# Altium PCB gps-tag-lora-addon.PcbDoc (part 2 of 3)
Units mm, origin at the board's own origin, x right, y up, seen from the top; angles counter-clockwise.
Board outline 60 x 35 mm, 2 copper layers (Top Layer, Bottom Layer); 76 components, 64 nets, 296 pads, 200 vias.
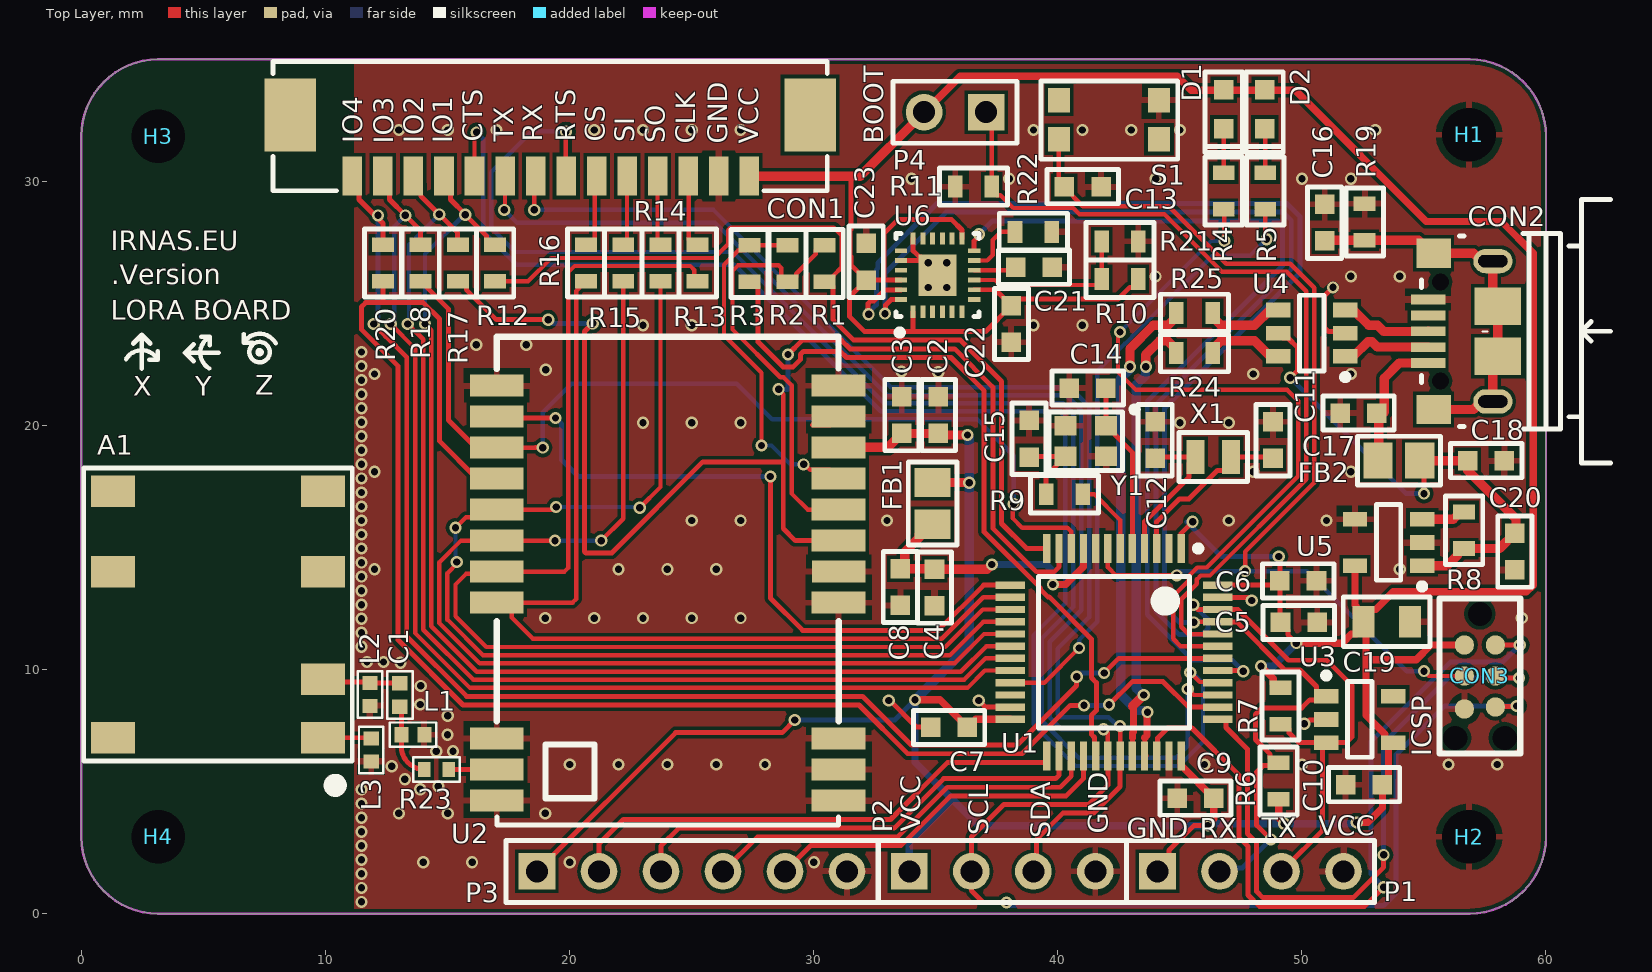
[diagram p0: Top Layer view]

## Part data (continued)
U3: "MICROCHIP   24AA02E48T-I/OT   EEPROM, EUI-48 Node Identity, 2 Kbit, 2 BLK (128K x 8bit), 400 kHz, I2C, SOT-23, 5 Pins", Case/Package=SOT-23, Frequency=400kHz, Manufacturer=Microchip, Max Frequency=100kHz, Max Operating Temperature=85°C, Max Supply Voltage=5.5V, Min Operating Temperature=-40°C, Min Supply Voltage=1.7V, Nominal Supply Current=3mA, Operating Supply Voltage=5V, Package Quantity=3000, Supplier Part Number 1=1688855, Access Time=3500ns, ComponentLink1Description=http://www.farnell.com/datasheets/1725195.pdf?src-supplier=Element14, ComponentLink1URL=http://www.farnell.com/datasheets/1725195.pdf?src-supplier=Element14, ComponentLink2Description=http://www.farnell.com/datasheets/631538.pdf?src-supplier=Element14, ComponentLink2URL=http://www.farnell.com/datasheets/631538.pdf?src-supplier=Element14, ComponentLink3Description=http://ww1.microchip.com/downloads/en/DeviceDoc/22124D.pdf?src-supplier=Avnet+Europe, ComponentLink3URL=http://ww1.microchip.com/downloads/en/DeviceDoc/22124D.pdf?src-supplier=Avnet+Europe, ComponentLink4Description=http://www.microchip.com/mymicrochip/filehandler.aspx?ddocname=en538826&src-supplier=Future+Electronics, ComponentLink4URL=http://www.microchip.com/mymicrochip/filehandler.aspx?ddocname=en538826&src-supplier=Future+Electronics, ComponentLink5Description=http://www.produktinfo.conrad.com/datenblaetter/650000-674999/651228-da-01-en-EEPROM_24AA02E48T_I_OT_SOT_23_5_MCP.pdf?src-supplier=Conrad, ComponentLink5URL=http://www.produktinfo.conrad.com/datenblaetter/650000-674999/651228-da-01-en-EEPROM_24AA02E48T_I_OT_SOT_23_5_MCP.pdf?src-supplier=Conrad, Density=2Kb, Height=1.3mm, Interface=I2C,Serial, Lead Free="Lead Free", Length=3.1mm, Manufacturer Part Number=24AA02E48T-I/OT, Memory Size=2Kb, Memory Type=EEPROM, Mount="Surface Mount", Number of Pins=5, Packaging="Tape and Reel", Pricing 1="1 = 0.17600, 10 = 0.17100, 25 = 0.16400, 50 = 0.16000, 100 = 0.15600 (GBP)", Radiation Hardening=No, REACH SVHC="No SVHC", RoHS=Yes, Stock 1=13638, Supplier 1=Farnell, Termination=SMD/SMT, Width=1.8mm
U4: "TVS DIODE 5.25VWM 17VC SOT23-6", Breakdown Voltage=6V, Capacitance=3.5pF, Case/Package=SOT-23, Clamping Voltage=17V, Leakage Current=150nA, Manufacturer=STMicroelectronics, Max Operating Temperature=125°C, Min Operating Temperature=-40°C, Operating Supply Voltage=1.1V, Package Quantity=3000, Peak Pulse Current=5A, Power Line Protection=Yes, Reverse Standoff Voltage=5.25V, Supplier Part Number 1=1269406, Test Current=1mA, Working Voltage=5V, ComponentLink1Description=http://www.farnell.com/datasheets/1690354.pdf, ComponentLink1URL=http://www.farnell.com/datasheets/1690354.pdf, ComponentLink2Description=http://www.st.com/content/ccc/resource/technical/document/datasheet/06/1d/48/9c/6c/20/4a/b2/CD00050750.pdf/files/CD00050750.pdf/jcr:content/translations/en.CD00050750.pdf, ComponentLink2URL=http://www.st.com/content/ccc/resource/technical/document/datasheet/06/1d/48/9c/6c/20/4a/b2/CD00050750.pdf/files/CD00050750.pdf/jcr:content/translations/en.CD00050750.pdf, ComponentLink3Description=http://www.st.com/web/en/resource/technical/document/datasheet/CD00050750.pdf, ComponentLink3URL=http://www.st.com/web/en/resource/technical/document/datasheet/CD00050750.pdf, ComponentLink4Description=http://datasheet.iiic.cc/stmicroelectronics/USBLC6-2SC6.pdf, ComponentLink4URL=http://datasheet.iiic.cc/stmicroelectronics/USBLC6-2SC6.pdf, ComponentLink5Description=http://www.produktinfo.conrad.com/datenblaetter/1100000-1199999/001184109-da-01-en-IC_ESD_PROTECTI_USBLC6_2SC6_SOT_23_6_STM.pdf, ComponentLink5URL=http://www.produktinfo.conrad.com/datenblaetter/1100000-1199999/001184109-da-01-en-IC_ESD_PROTECTI_USBLC6_2SC6_SOT_23_6_STM.pdf, Contact Plating=Matte,Tin, Data Rate=480Mbps, Depth=1.75mm, Direction=Bidirectional,Unidirectional, Element Configuration=Dual, ESD Protection=Yes, Height=1.3mm, Lead Free="Lead Free", Length=3.05mm, Manufacturer Part Number=USBLC6-2SC6, Max Breakdown Voltage=6V, Max Reverse Leakage Current=150nA, Min Breakdown Voltage=6V, Mount="Surface Mount", Number of Bidirectional Channels=2, Number of Channels=2, Number of Elements=1, Number of Pins=6, Packaging="Tape and Reel", Polarity=Bidirectional,Unidirectional, Pricing 1="5=0.327, 50=0.216, 100=0.165, 500=0.155, 1500=0.145 (GBP)", Radiation Hardening=No, REACH SVHC="No SVHC", Reverse Breakdown Voltage=6V, Stock 1=40838, Supplier 1=Farnell, Termination=SMD/SMT, Width=1.75mm
U5: "IC REG LINEAR 2.6V 150MA SOT23-5", Case/Package=TSOT, Dropout Voltage=130mV, Manufacturer="Texas Instruments", Max Input Voltage=5.5V, Max Operating Temperature=105°C, Max Output Current=150mA, Max Power Dissipation=500mW, Min Input Voltage=2.2V, Min Operating Temperature=-40°C, Nominal Output Voltage=2.6V, Output Voltage Accuracy=2%, Package Quantity=1, Quiescent Current=500nA, Supplier Part Number 1=296-35542-1-ND, Accuracy=2%, ComponentLink1Description=http://www.ti.com/lit/ds/symlink/tps783.pdf?src-supplier=Digi-Key, ComponentLink1URL=http://www.ti.com/lit/ds/symlink/tps783.pdf?src-supplier=Digi-Key, ComponentLink2Description=http://www.mouser.com/ds/2/405/sbvs133a-521627.pdf?src-supplier=Mouser, ComponentLink2URL=http://www.mouser.com/ds/2/405/sbvs133a-521627.pdf?src-supplier=Mouser, ComponentLink3Description=http://www.farnell.com/datasheets/1865508.pdf?src-supplier=Element14, ComponentLink3URL=http://www.farnell.com/datasheets/1865508.pdf?src-supplier=Element14, Height=1mm, Lead Free="Lead Free", Length=3.05mm, Manufacturer Part Number=TPS78326DDCT, Min Current Limit=150mA, Mount="Surface Mount", Number of Outputs=1, Number of Pins=5, Number of Regulators=1, Output Current=150mA, Output Type=Fixed, Output Voltage=2.6V, Packaging="Tape and Reel", Polarity=Positive, Power Dissipation=500mW, Power Rating=500mW, Pricing 1="1 = 0.96000, 10 = 0.85700, 100 = 0.66810 (USD)", Radiation Hardening=No, REACH SVHC="No SVHC", RoHS=Yes, Stock 1=873, Supplier 1=Digi-Key, Width=1.75mm
U6: "IMU ACCEL/GYRO/MAG I2C/SPI 24QFN", Case/Package=QFN, Manufacturer="TDK InvenSense", Max Operating Temperature=85°C, Max Supply Voltage=3.6V, Min Operating Temperature=-40°C, Min Supply Voltage=2.4V, Package Quantity=1, Supplier Part Number 1=883-7942P, ComponentLink1Description=https://datasheet.ciiva.com/29175/mpu-9250-29175105.pdf?src-supplier=Digi-Key, ComponentLink1URL=https://datasheet.ciiva.com/29175/mpu-9250-29175105.pdf?src-supplier=Digi-Key, Height=1mm, Interface=I2C, Length=3.1mm, Manufacturer Part Number=MPU-9250, Mount="Surface Mount", Number of Pins=24, Output Type=SPI, RoHS=Yes, Sensor Type=Accelerometer, Stock 1=0, Supplier 1=RSComponents, Width=3.1mm
X1: library part ABS06-107-32.768KHZ-T, "32.768KHz 4pF Max. ESR 81 Kohms", Case/Package=0805, Case Code (Metric)=2012, ESR (Equivalent Series Resistance)=60kR, Frequency=32.768kHz, Frequency Stability=175ppm, Frequency Tolerance=20ppm, Load Capacitance=4pF, Manufacturer=Abracon, Max Operating Temperature=85°C, Min Operating Temperature=-40°C, Package Quantity=3000, Series Resistance=80kR, Supplier Part Number 1=2467860, Case Code (Imperial)=0805, ComponentLink1Description=https://datasheet.ciiva.com/23910/1759010-23910051.pdf, ComponentLink1URL=https://datasheet.ciiva.com/23910/1759010-23910051.pdf, ComponentLink2Description=https://datasheet.ciiva.com/24028/abs06-107-32-768khz-t-24028377.pdf, ComponentLink2URL=https://datasheet.ciiva.com/24028/abs06-107-32-768khz-t-24028377.pdf, ComponentLink3Description=https://datasheet.ciiva.com/29630/abs06-107-32-768khz-t-29630938.pdf, ComponentLink3URL=https://datasheet.ciiva.com/29630/abs06-107-32-768khz-t-29630938.pdf, ComponentLink4Description=https://datasheet.ciiva.com/29630/abs06-107-32-768khz-t-29630939.pdf, ComponentLink4URL=https://datasheet.ciiva.com/29630/abs06-107-32-768khz-t-29630939.pdf, Height=0.024inch, Lead Free="Lead Free", Length=0.079inch, Manufacturer Part Number=ABS06-107-32.768KHZ-T, Mount="Surface Mount", Number of Pins=2, Packaging="Tape and Reel", Pricing 1="5=0.733, 50=0.59, 250=0.583, 500=0.582, 1500=0.581, 3000=0.58, 15000=0.579 (EUR)", Radiation Hardening=No, REACH SVHC="No SVHC", Stock 1=7053, Supplier 1=Farnell, Termination=SMD/SMT, Tolerance=20ppm, Width=0.047inch
Y1: "16MHz ±20ppm Crystal 10pF 150 Ohm -40°C ~ 85°C  Surface Mount 4-SMD, No Lead (DFN, LCC)", Case/Package=CSMD, ESR (Equivalent Series Resistance)=150R, Frequency Stability=30ppm, Frequency Tolerance=20ppm, Load Capacitance=10pF, Manufacturer=Abracon, Manufacturer Part Number=ABM10-16.000MHZ-D30-T3, Max Operating Temperature=85°C, Min Operating Temperature=-40°C, Package Quantity=3000, Supplier Part Number 1=2467762, ComponentLink1Description=https://datasheet.ciiva.com/16410/abm10-16410918.pdf, ComponentLink1URL=https://datasheet.ciiva.com/16410/abm10-16410918.pdf, ComponentLink2Description=https://datasheet.ciiva.com/856/abm10-856088.pdf, ComponentLink2URL=https://datasheet.ciiva.com/856/abm10-856088.pdf, ComponentLink3Description=https://datasheet.ciiva.com/856/abm10-856089.pdf, ComponentLink3URL=https://datasheet.ciiva.com/856/abm10-856089.pdf, ComponentLink4Description=https://datasheet.ciiva.com/856/abm10-856090.pdf, ComponentLink4URL=https://datasheet.ciiva.com/856/abm10-856090.pdf, Depth=2mm, Frequency=16MHz, Height=0.028inch, Lead Free="Lead Free", Length=2.5mm, Mount="Surface Mount", Number of Pins=4, Packaging="Tape and Reel", Pricing 1="5=1.18, 50=0.742, 250=0.675, 500=0.607, 1500=0.569, 3000=0.558, 15000=0.547 (EUR)", REACH SVHC="No SVHC", Series Resistance=150R, Stock 1=8209, Supplier 1=Farnell, Termination=SMD/SMT, Tolerance=20ppm, Width=2mm
U2: ComponentLink1Description=Datasheet, ComponentLink1URL=http://www.ebyte.com/en/downpdf.aspx?id=437

## Via types
v1: diameter 0.5, hole 0.3, Top Layer to Bottom Layer, tented both sides, 196 vias
v2: diameter 0.5, hole 0.3, Top Layer to Bottom Layer, tented bottom, 4 vias

## Nets (pads, with @x,y where several pads share a name; then routed paths per layer and width w, separated by ;. In a path a pad name is that pad's centre, name@x,y a point inside that pad or via, vN(x,y) a via of type N, cw(c..) or ccw(c..) an arc to the next point about the centre after c; other vN are vias at no path point)
ACCEL_INT: U1.41 U6.12 | length 37.7
  Top Layer w0.2: U6.12@36.575,27.15 36.575,27.558 36.775,27.758 v1(36.775,27.825) ; U1.41@46.554,9.952 47.573,9.952 v1(47.6,9.925)
  Bottom Layer w0.2: v1(36.775,27.825) 37.325,28.375 49.025,28.375 49.207,28.193 49.207,26.533 43.664,20.989 43.664,12.236 45.523,10.377 47.148,10.377 v1(47.6,9.925)
BOOT0: P4.1 R11.1 U1.44 | length 35.6
  Top Layer w0.178: P4.1@37.065,32.825 37.3,32.59 R11.1@37.3,29.775 37.3,29.625 37.498,29.427 37.648,29.427 38.175,28.9 40.633,28.9 40.888,28.645 44.371,28.645 46.725,26.291 49.384,26.291 50.18,25.495 50.18,17.787 46.236,13.843 45.854,13.843 45.699,13.688 45.699,13.51 45.059,12.87 45.059,11.744 45.369,11.434 46.536,11.434 U1.44@46.554,11.452
CLK: CON1.3 R13.1 | length 3.1
  Top Layer w0.178: CON1.3@24.856,30.208 24.889,30.175 24.889,27.611 25.1,27.4 R13.1@25.25,27.4
CS: CON1.6 R16.1 | length 3.1
  Top Layer w0.178: R16.1@20.675,27.4 20.825,27.4 21.036,27.611 21.036,30.138 CON1.6@21.106,30.208
DIO1: U1.13 U2.13 | length 29.2
  Top Layer w0.203: U2.13@17.02,20.355 17.075,20.3 v1(19.425,20.3) ; v1(28.226,17.901) 28.226,12.924 29.55,11.6 35.109,11.6 36.961,13.452 U1.13@38.054,13.452
  Bottom Layer w0.203: v1(19.425,20.3) 19.668,20.057 19.668,18.582 20.349,17.901 v1(28.226,17.901)
DIO2: R3.1 U1.29 | length 30.5
  Top Layer w0.203: R3.1@27.375,25.875 27.525,25.875 27.723,25.677 27.723,23.414 28.741,22.396 29.159,22.396 29.454,22.691 29.454,22.901 29.584,23.031 31.086,23.031 31.343,22.774 35.626,22.774 36.985,21.415 36.985,15.63 39.296,13.319 39.296,13.266 39.591,12.971 39.644,12.971 41.379,11.236 41.379,9.658 41.579,9.458 41.579,8.316 41.373,8.11 41.373,7.342 41.506,7.209 41.506,6.5 U1.29@41.554,6.452